# EAGLE board squaresynth (EAGLE 6.3)
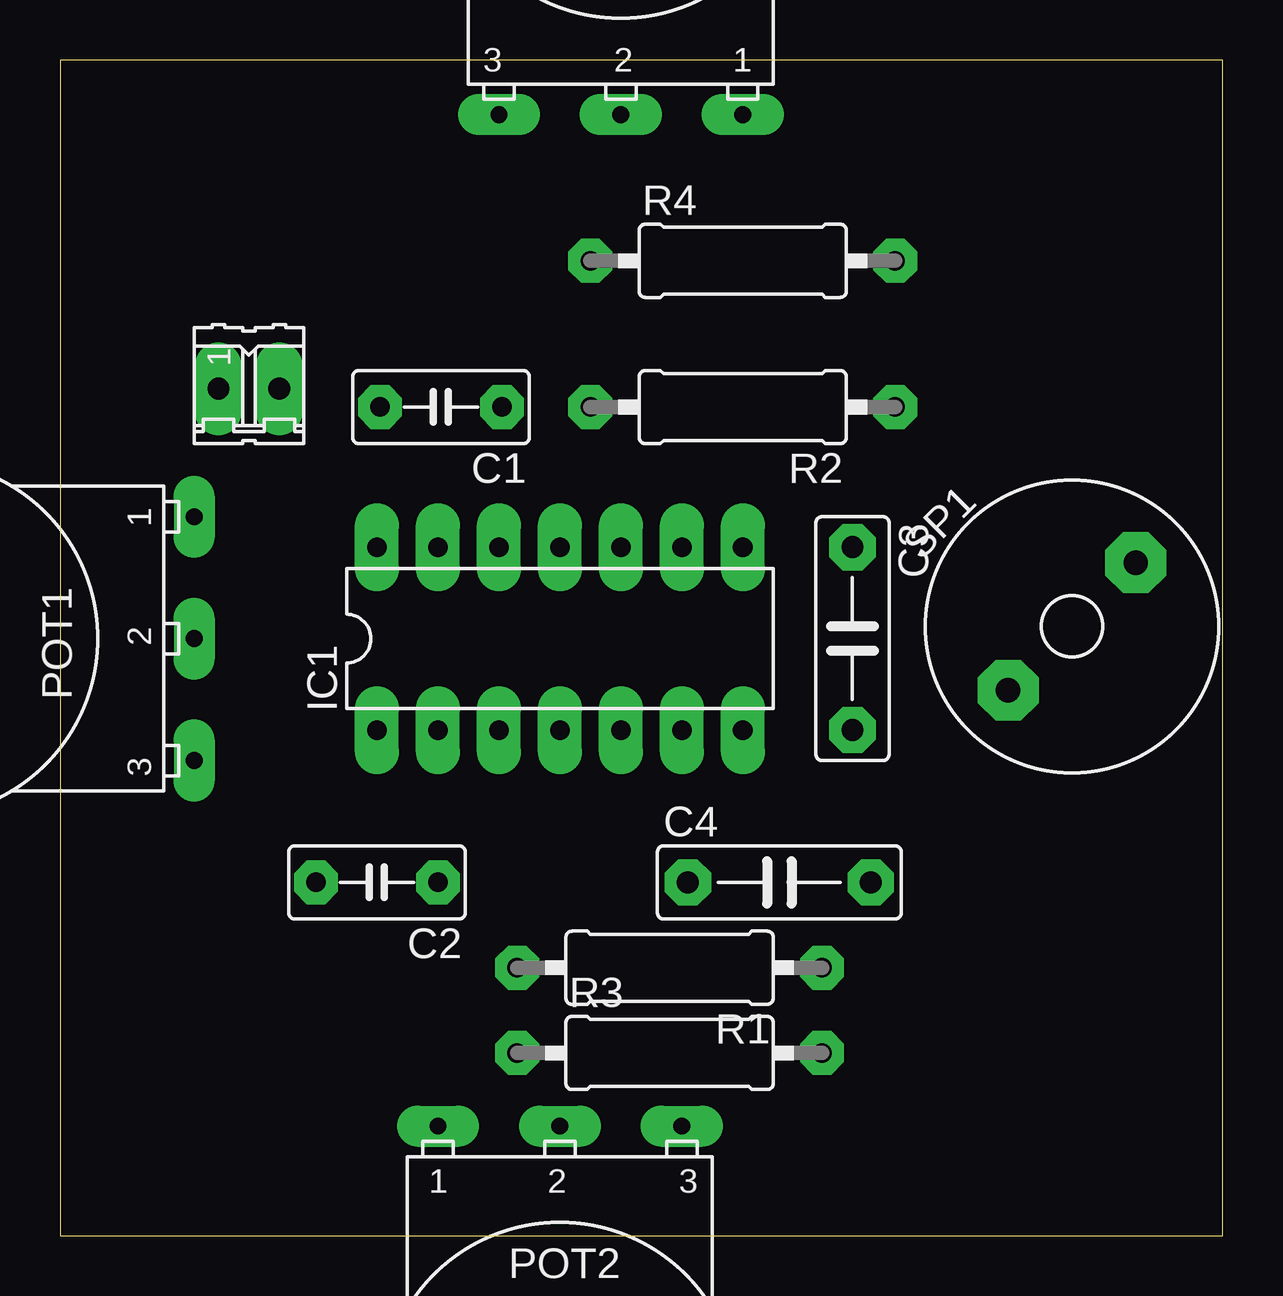
[diagram p0: board, top side]
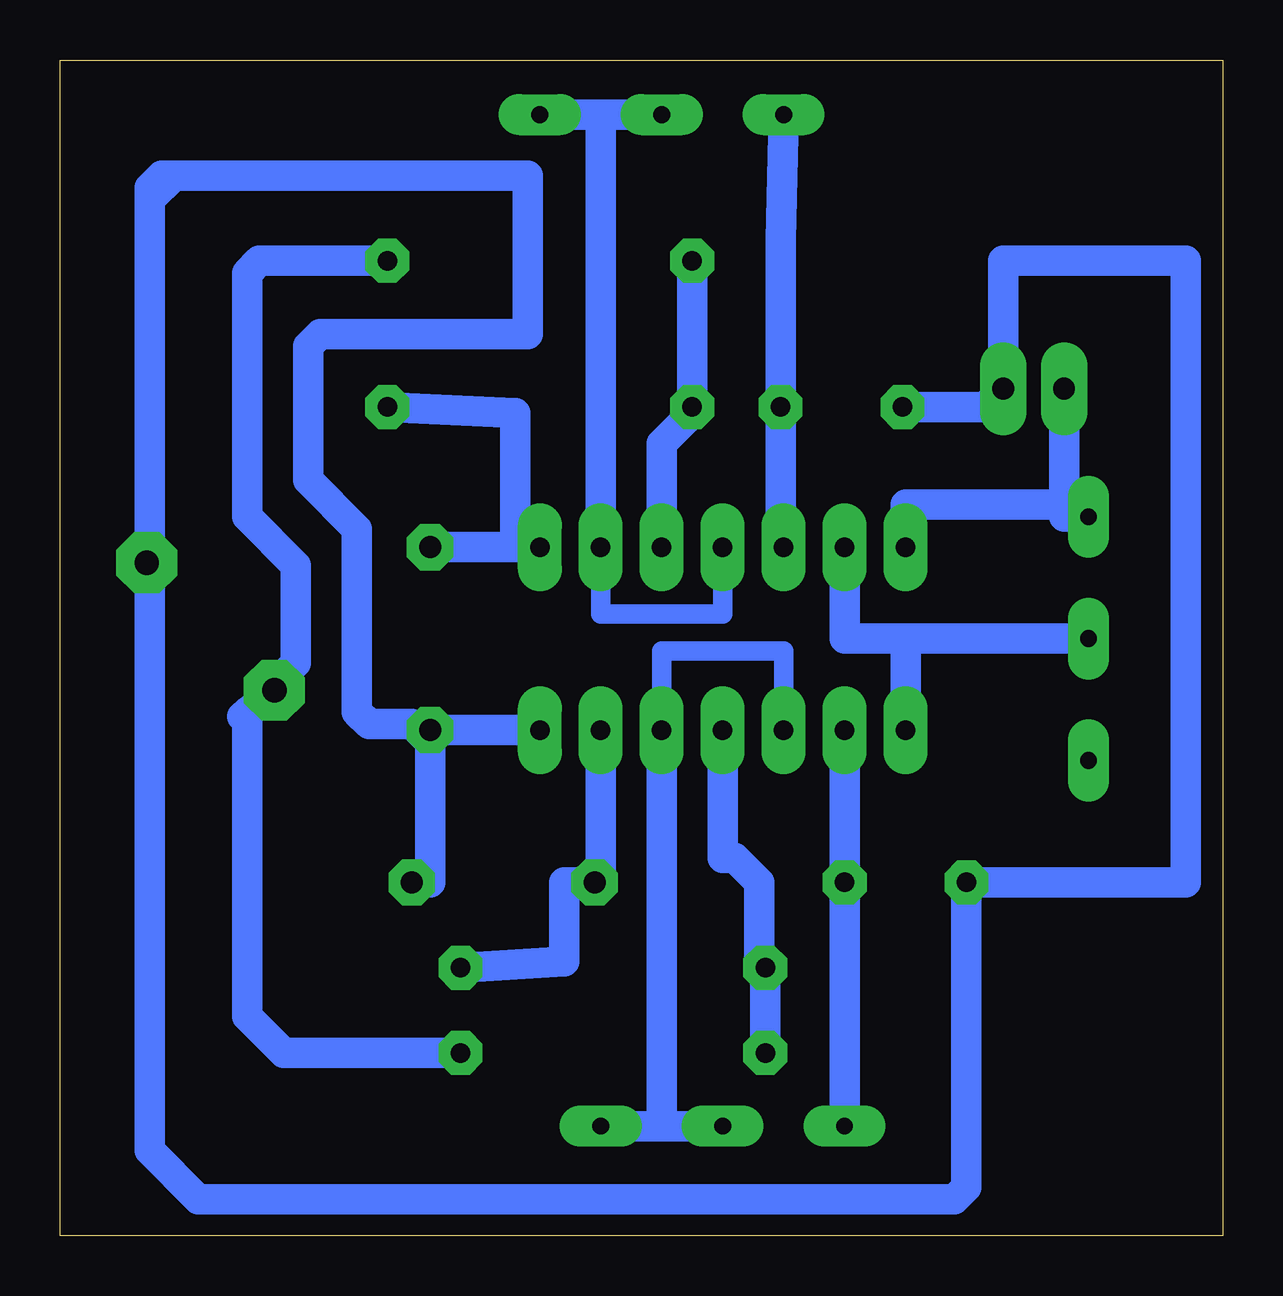
[diagram p1: board, bottom side, seen from below]

Size 48.44 x 49.01 mm. Coordinates in mm from the lower left corner, seen from the top.
Outline: 0,0 48.44,0 48.44,49.01 0,49.01 0,0
Copper layers (1*16): Top 0.035mm / dielectric 1.5mm / Bottom 0.035mm
Design rules "default *": minimum track width 10mil, minimum drill 24mil, track to track 20mil, track to pad 20mil, pad to pad 20mil, via to via 8mil, smd to smd 8mil, copper to edge 60mil, drill to drill 16mil, minimum pad ring 20mil, minimum via ring 16mil, stop-mask expansion 4mil, vias tented up to drill 0mil, thermal gap 10mil

## Footprints (pad centres in the part's own frame; a part is rotated, then mirrored left to right if it is on the bottom)
02P = drill 0.914 long: 1 -1.27,0; 2 1.27,0
C050-030X075 = drill 0.813 octagon: 1 -2.54,0; 2 2.54,0
C075-032X103 = drill 0.914 octagon: 1 -3.81,0; 2 3.81,0
DIL14 = drill 0.813 long: 1 -7.62,-3.81; 2 -5.08,-3.81; 3 -2.54,-3.81; 4 0,-3.81; 5 2.54,-3.81; 6 5.08,-3.81; 7 7.62,-3.81; 8 7.62,3.81; 9 5.08,3.81; 10 2.54,3.81; 11 0,3.81; 12 -2.54,3.81; 13 -5.08,3.81; 14 -7.62,3.81
16MM = drill 0.7 long: 1 5.08,0; 2 0,0; 3 -5.08,0
0309/12 = drill 0.813 octagon: 1 -6.35,0; 2 6.35,0
AL60P = drill 1.016 pad 2.54 octagon: 1 -3.759,0; 2 3.759,0

## Placement (x,y rotation side)
9V  [02P]  7.87,35.31 0 top
C1  [C050-030X075]  15.88,34.54 180 top
C2  [C050-030X075]  13.21,14.73 180 top
C3  [C075-032X103]  33.02,24.89 270 top
C4  [C075-032X103]  29.97,14.73 0 top
IC1  4093N  [DIL14]  20.83,24.89 0 top
POT1  [16MM]  5.59,24.89 90 top
POT2  [16MM]  20.83,4.57 180 top
POT3  [16MM]  23.37,46.74 0 top
R1  [0309/12]  25.4,11.18 180 top
R2  [0309/12]  28.45,34.54 180 top
R3  [0309/12]  25.4,7.62 0 top
R4  [0309/12]  28.45,40.64 0 top
SP1  SPEAKER/AL60P  [AL60P]  42.16,25.4 45 top

## Library data of the parts
9V = con-amp-quick
C1-C4 R1-R4 = rcl
IC1 = 40xx
POT1-POT3 = gm-pots
SP1 = adafruit

## Nets
GND: 9V.2 C1.2 C2.2 C3.2 C4.2 IC1.7 SP1.2
N$1: IC1.1 IC1.13 POT1.2
N$2: IC1.3 IC1.5 POT2.2 POT2.3
N$3: C1.1 IC1.12 POT3.3
N$4: IC1.9 IC1.11 POT3.1 POT3.2
N$5: C2.1 IC1.2 POT2.1
N$6: IC1.10 R2.2 R4.1
N$7: C4.1 IC1.6 R1.1
N$8: R3.2 R4.2 SP1.1
N$9: IC1.4 R1.2 R3.1
N$10: C3.1 IC1.8 R2.1
VCC: 9V.1 IC1.14 POT1.1

## Tracks (layer width: path | path; a pad name or v marks a point on that pad's centre or on a via)
GND
  Bottom 1.27: C3.2 33.02,14.73 C4.2 | C3.2 IC1.7 | C1.2 9.91,34.54 9V.2 9.14,40.64 1.52,40.64 1.52,14.73 C2.2 10.67,2.03 11.18,1.52 42.67,1.52 44.7,3.56 44.7,43.18 43.69,44.2 | C3.2 33.27,20.83 33.78,21.34 35.56,21.34 36.07,21.84 36.07,29.46 38.1,31.5 38.1,37.08 37.59,37.59 28.96,37.59 28.96,44.2 43.69,44.2 | SP1.2 44.7,28.18 44.7,43.69 44.2,44.2 43.69,44.2
N$1
  Bottom 1.27: IC1.13 15.75,24.89 13.21,24.89 | 13.21,24.89 IC1.1 | POT1.2 13.21,24.89
N$2
  Bottom 0.813: IC1.5 23.37,24.38 18.29,24.38 IC1.3
  Bottom 1.27: IC1.5 23.37,4.57 | 23.37,4.57 POT2.2 | POT2.3 23.37,4.57
N$3
  Bottom 1.27: IC1.12 18.41,28.83 C1.1 18.41,41.53 POT3.3
N$4
  Bottom 0.813: IC1.11 20.83,25.91 25.91,25.91 IC1.9
  Bottom 1.27: IC1.9 25.91,46.74 | 25.91,46.74 POT3.2 | POT3.1 25.91,46.74
N$5
  Bottom 1.27: IC1.2 C2.1 POT2.1
N$6
  Bottom 1.27: IC1.10 23.37,33.02 22.1,34.29 R2.2 R4.1
N$7
  Bottom 1.27: IC1.6 25.91,15.24 26.16,14.99 C4.1 27.43,14.73 27.43,11.43 R1.1
N$8
  Bottom 1.27: R4.2 40.13,40.64 40.64,40.13 40.64,29.97 38.61,27.94 38.61,23.88 39.62,22.86 39.62,22.35 39.51,22.47 SP1.1 40.84,21.64 40.64,21.84 40.64,9.14 39.12,7.62 R3.2
N$9
  Bottom 1.27: R3.1 R1.2 19.3,11.43 19.3,14.73 20.32,15.75 20.83,15.75 IC1.4
N$10
  Bottom 1.27: C3.1 29.46,28.7 | 29.46,28.7 IC1.8 | R2.1 29.46,34.29 29.46,28.7
VCC
  Bottom 1.27: 9V.1 6.6,29.97 POT1.1 5.59,30.48 13.21,30.48 IC1.14